# EAGLE board 65df3fb1e0cf6e15ab690662b1922243 (EAGLE 7.0.0)
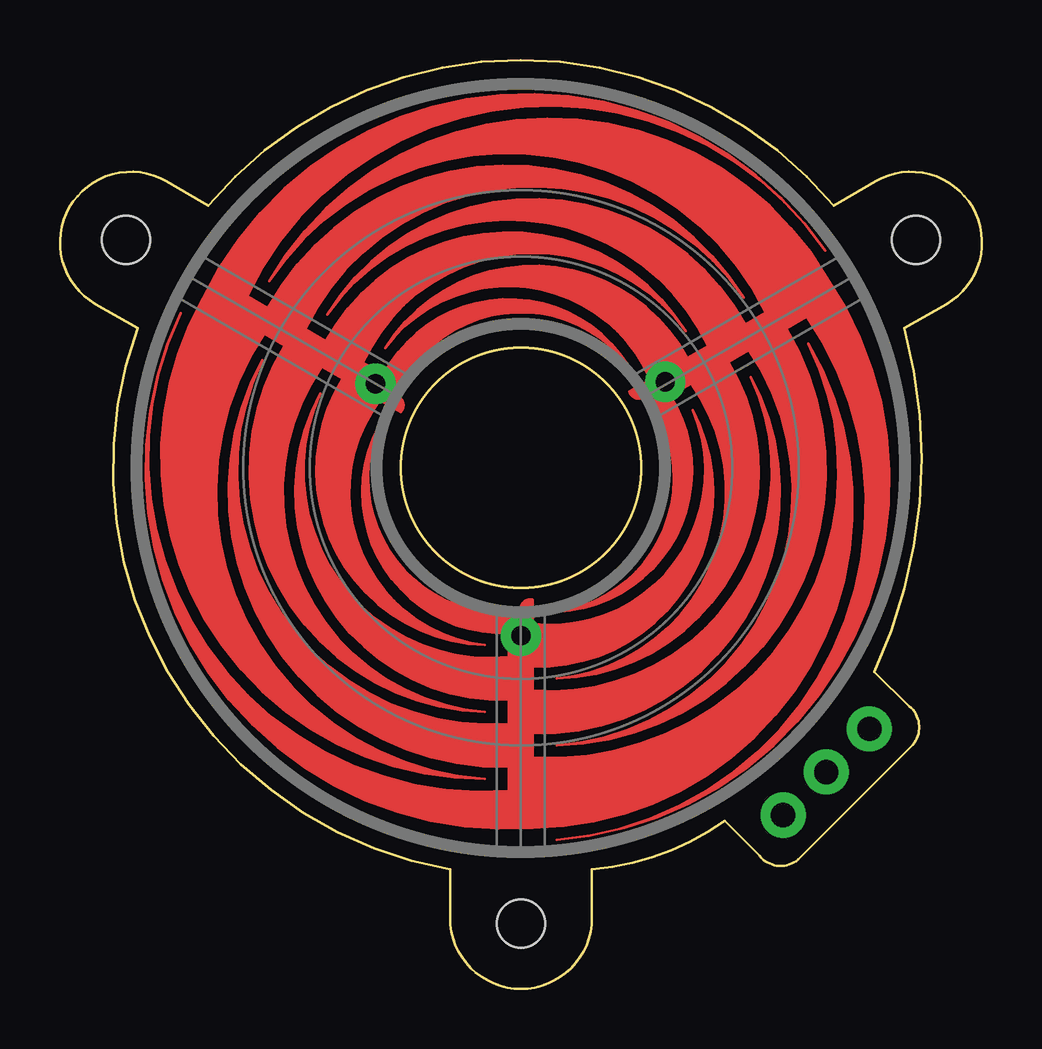
[diagram p0: board, top side]
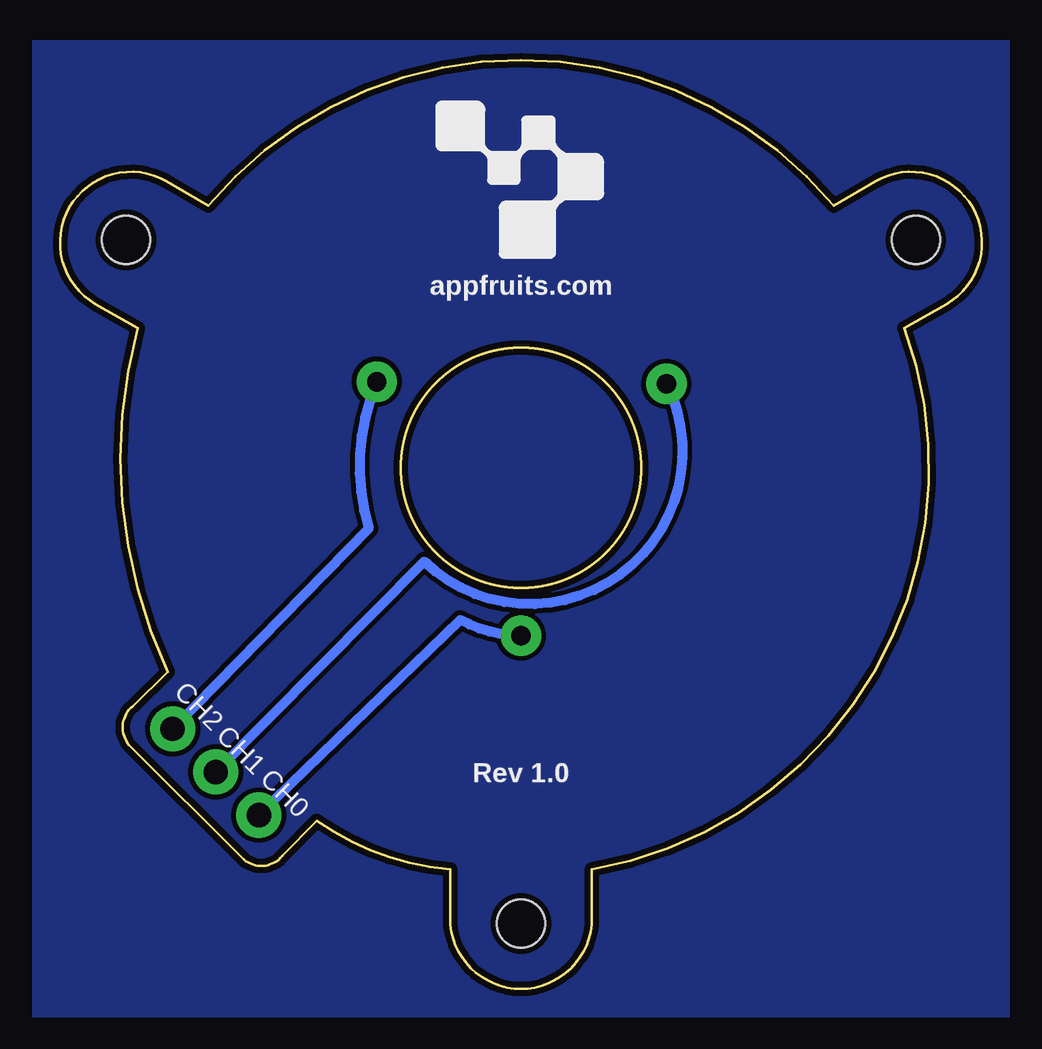
[diagram p1: board, bottom side, seen from below]

Size 38.42 x 38.72 mm. Coordinates in mm from the lower left corner, seen from the top.
Outline: 22.16,4.98 arc30 27.71,7 29.16,5.54 arc90 30.75,5.39 35.54,10.18 arc90 35.39,11.77 33.93,13.22 arc40 35.18,27.54 36.94,28.55 arc180 33.98,33.67 32.23,32.65 arc100 6.18,32.65 4.43,33.67 arc180 1.48,28.55 3.23,27.54 arc100 16.26,4.98 16.25,2.95 arc180 22.16,2.95 22.16,4.98
Outline: circle at 19.21,21.72 radius 5
Copper layers (1*16): Top 0.035mm / dielectric 1.5mm / Bottom 0.035mm
Design rules "SparkFun": minimum track width 8mil, minimum drill 20mil, track to track 8mil, track to pad 8mil, pad to pad 8mil, via to via 8mil, smd to smd 8mil, copper to edge 10mil, drill to drill 8mil, minimum pad ring 12mil, minimum via ring 10mil, stop-mask expansion 4mil, vias tented up to drill 25mil, thermal gap 10mil
Holes 2 mm at 35.66,31.22 2.75,31.22 19.21,2.72

## Footprints (pad centres in the part's own frame; a part is rotated, then mirrored left to right if it is on the bottom)
1X03_NO_SILK = drill 1.016 pad 1.88: 1 0,0; 2 2.54,0; 3 5.08,0
QT_WHEEL = drill 0.8 pad 1.676: P0 7,0.1; P1 -3.5,6.062; P2 -3.5,-6.062

## Placement (x,y rotation side)
JP1  [1X03_NO_SILK]  30.13,7.25 45 top
U$1  QT_WHEEL_15MM  [QT_WHEEL]  19.21,21.72 30 top

## Library data of the parts
JP1 = SparkFun-Connectors
U$1 = appfruits

## Nets
N$1: JP1.2 U$1.P1
N$2: JP1.1 U$1.P2
N$3: JP1.3 U$1.P0

## Tracks (layer width: path | path; a pad name or v marks a point on that pad's centre or on a via)
GND
  pour Bottom: -1.11,-1.14 -1.11,39.5 39.53,39.5 39.53,-1.14
N$1
  Bottom 0.406: U$1.P1 arc160 23.25,17.81 JP1.2
N$2
  Bottom 0.406: U$1.P2 arc27 21.75,15.37 JP1.1
N$3
  Bottom 0.406: U$1.P0 arc-39 25.56,19.18 JP1.3

## Text on the board
bPlace: appfruits.com | CH2 | CH1 | Rev 1.0 | CH0